# EAGLE board ebox (EAGLE 6.3), part 1 of 2
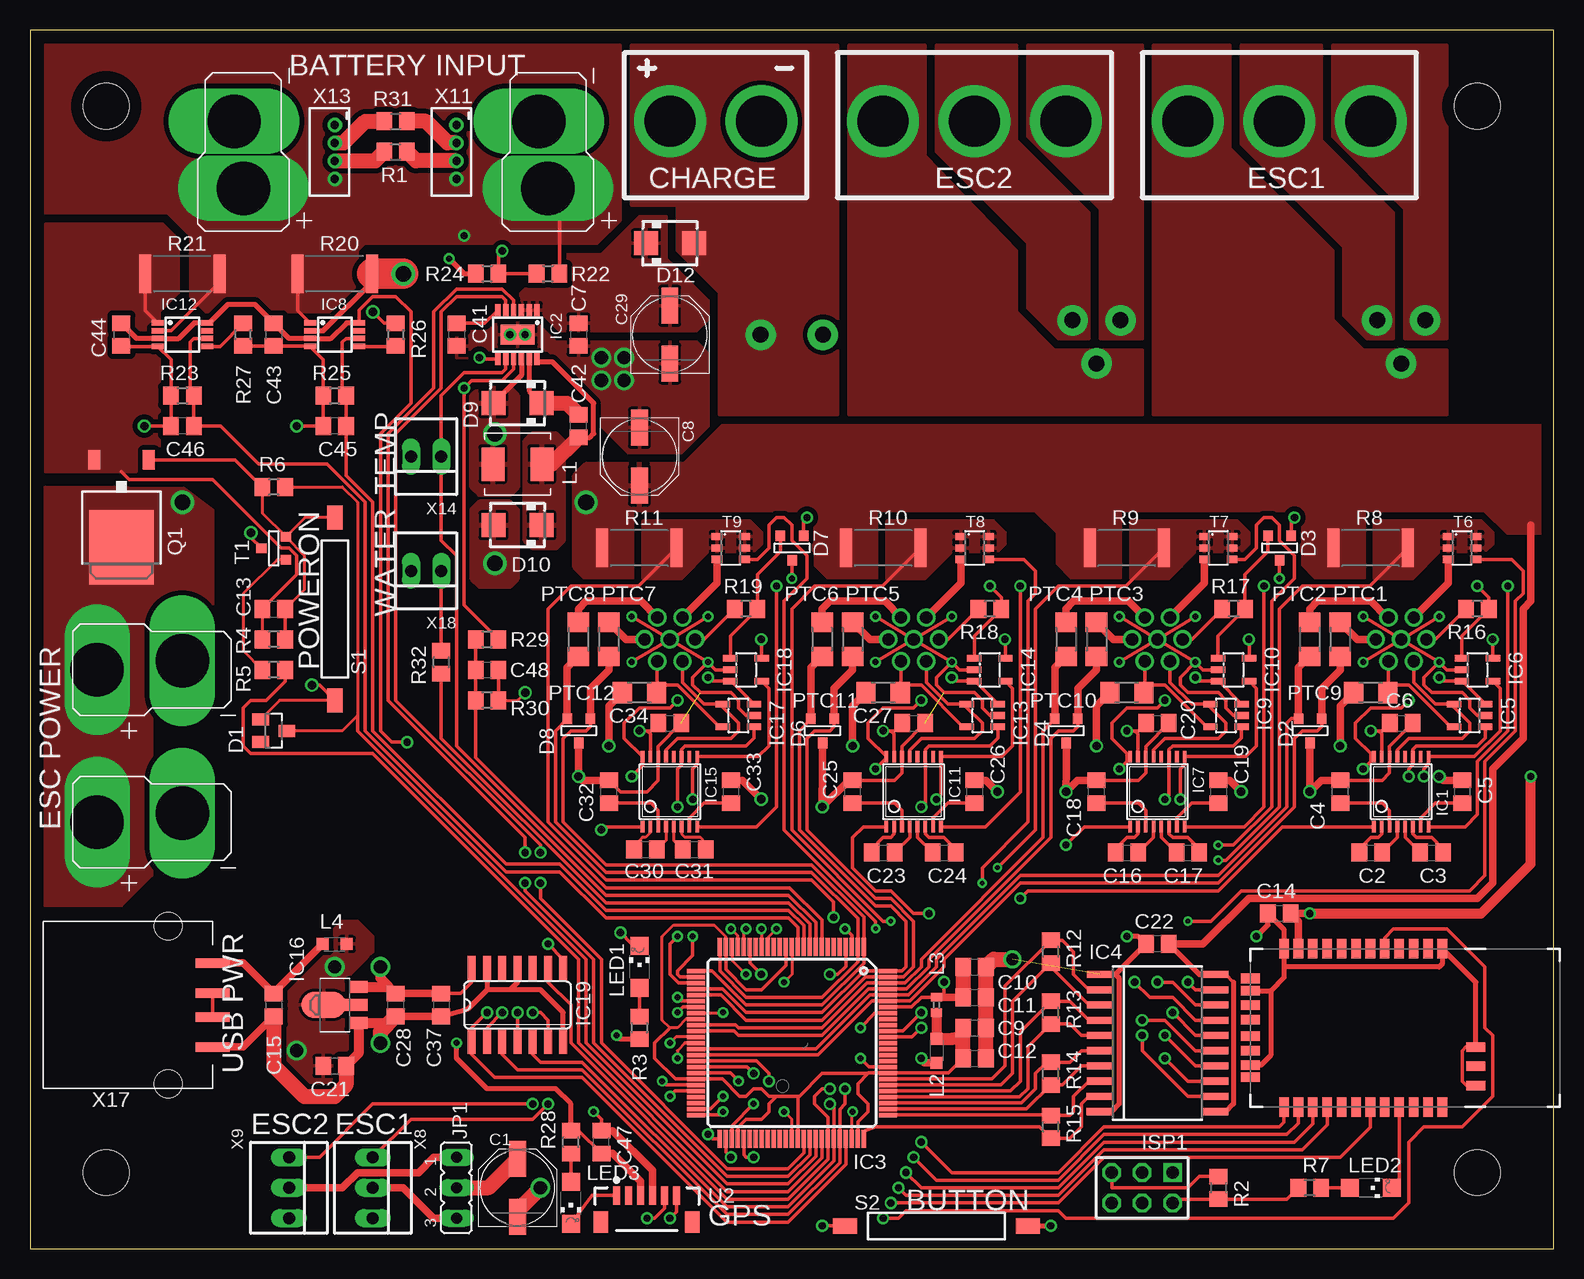
[diagram p0: board, top side]
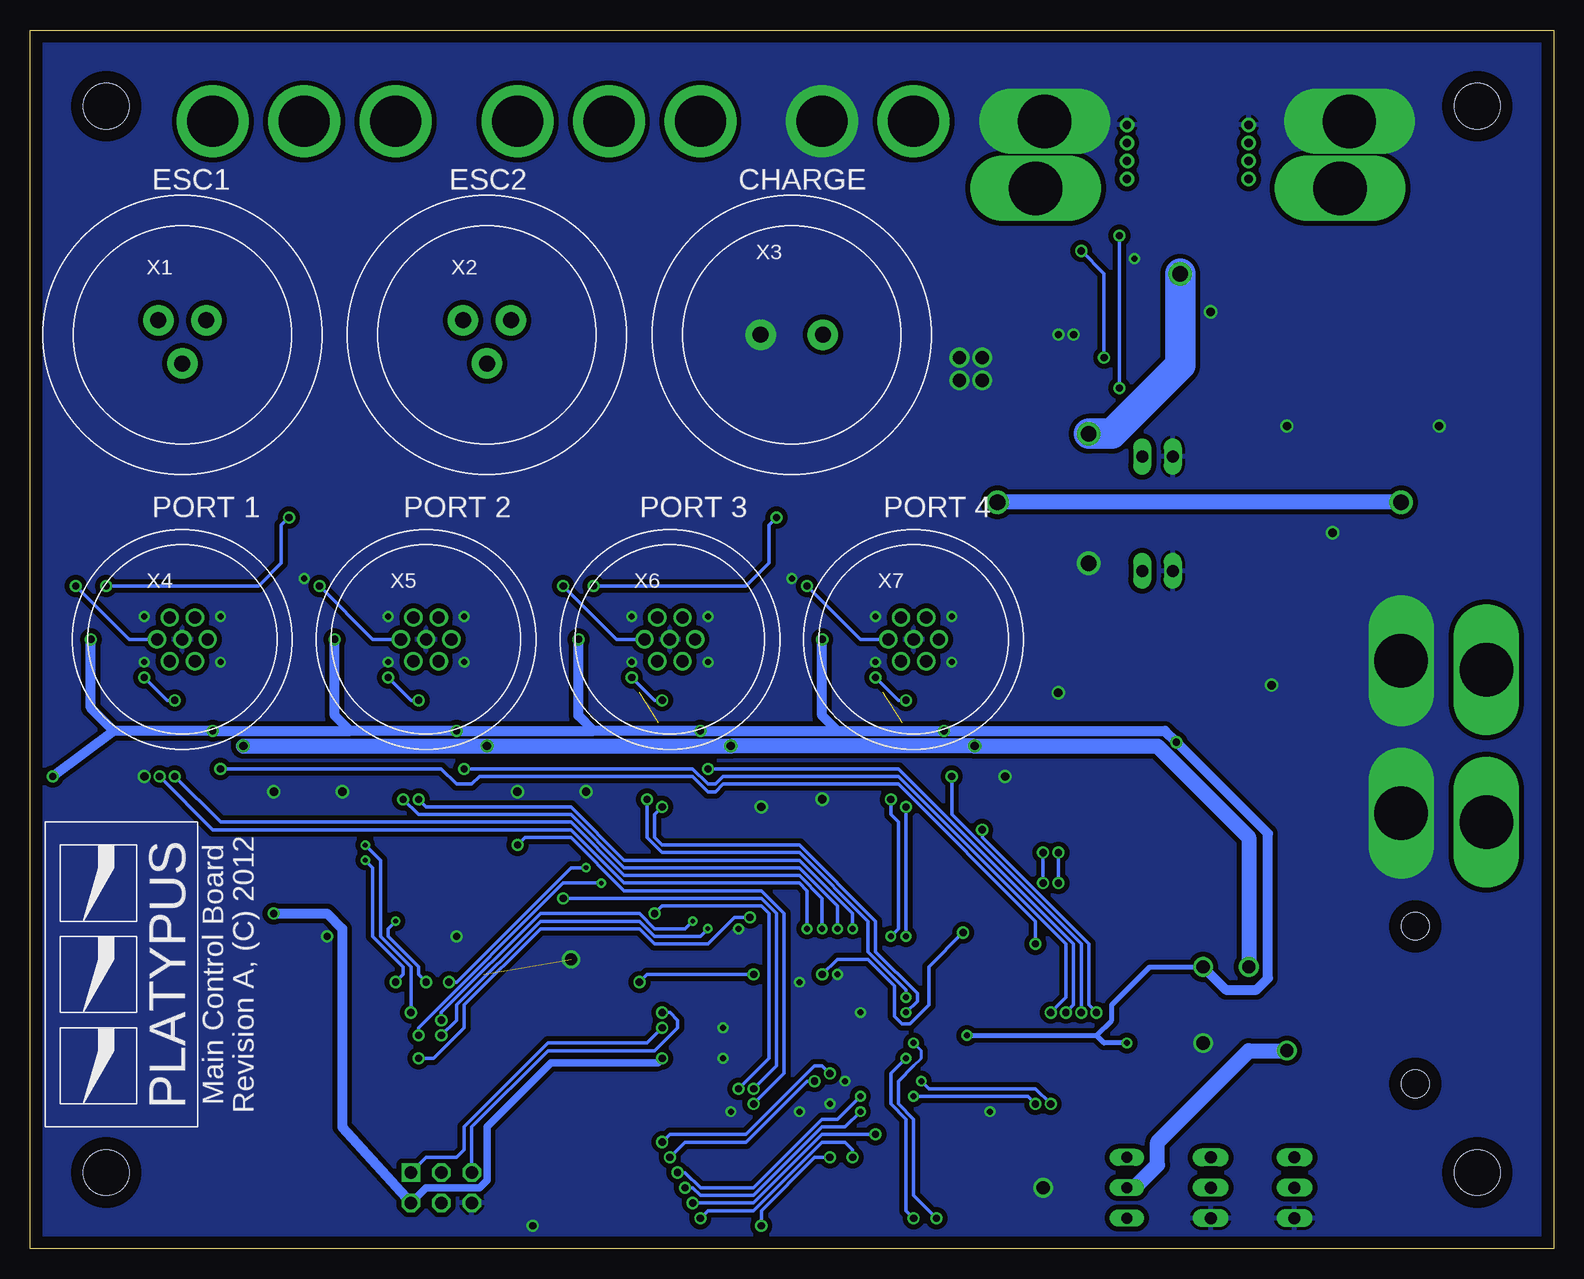
[diagram p1: board, bottom side, seen from below]

Size 127 x 101.6 mm. Coordinates in mm from the lower left corner, seen from the top.
Outline: 0,0 127,0 127,101.6 0,101.6 0,0
Copper layers (1*16): Top 0.035mm / dielectric 1.5mm / Bottom 0.035mm
Design rules "default *": minimum track width 10mil, minimum drill 15mil, track to track 5mil, track to pad 5mil, pad to pad 5mil, via to via 5mil, smd to smd 5mil, copper to edge 40mil, drill to drill 8mil, minimum pad ring 10mil, minimum via ring 8mil, stop-mask expansion 4mil, vias tented up to drill 0mil, thermal gap 10mil
Holes 3.81 mm at 120.65,95.25 120.65,6.35 6.35,6.35 6.35,95.25

## Footprints (pad centres in the part's own frame; a part is rotated, then mirrored left to right if it is on the bottom)
BULLET = drill 4.25 pad 6: P$1 0,0
PANASONIC_D = smd 3 x 1.4: + 2.4,0; - -2.4,0
C0805 = smd 1.3 x 1.5: 1 -0.95,0; 2 0.95,0
SOT23 = smd 1 x 1.4: 1 -0.95,-1.1; 2 0.95,-1.1; 3 0,1.1
SOT-23 = smd 0.787 x 0.889: 1 0.025,-1.016; 2 -0.94,1.016; 3 0.991,1.016
SMA = smd 2 x 2: A 2,0; C -2,0
TSSOP16 = smd 0.305 x 0.991: 1 -2.275,-2.918; 2 -1.625,-2.918; 3 -0.975,-2.918; 4 -0.325,-2.918; 5 0.325,-2.918; 6 0.975,-2.918; 7 1.625,-2.918; 8 2.275,-2.918; 9 2.275,2.918; 10 1.625,2.918; 11 0.975,2.918; 12 0.325,2.918; 13 -0.325,2.918; 14 -0.975,2.918; 15 -1.625,2.918; 16 -2.275,2.918
MSOP12-MSE = smd 0.45 x 1: 1 -1.625,-2.05; 2 -0.975,-2.05; 3 -0.325,-2.05; 4 0.325,-2.05; 5 0.975,-2.05; 6 1.625,-2.05; 7 1.625,2.05; 8 0.975,2.05; 9 0.325,2.05; 10 -0.325,2.05; 11 -0.975,2.05; 12 -1.625,2.05 | smd 2.845 x 1.651: 13 0,0
TQFP100 = smd 1.5 x 0.35: 1 -8,6; 2 -8,5.5; 3 -8,5; 4 -8,4.5; 5 -8,4; 6 -8,3.5; 7 -8,3; 8 -8,2.5; 9 -8,2; 10 -8,1.5; 11 -8,1; 12 -8,0.5; 13 -8,0; 14 -8,-0.5; 15 -8,-1; 16 -8,-1.5; 17 -8,-2; 18 -8,-2.5; 19 -8,-3; 20 -8,-3.5; 21 -8,-4; 22 -8,-4.5; 23 -8,-5; 24 -8,-5.5; 25 -8,-6; 51 8,-6; 52 8,-5.5; 53 8,-5; 54 8,-4.5; 55 8,-4; 56 8,-3.5; 57 8,-3; 58 8,-2.5; 59 8,-2; 60 8,-1.5; 61 8,-1; 62 8,-0.5; 63 8,0; 64 8,0.5; 65 8,1; 66 8,1.5; 67 8,2; 68 8,2.5; 69 8,3; 70 8,3.5; 71 8,4; 72 8,4.5; 73 8,5; 74 8,5.5; 75 8,6 | smd 0.35 x 1.5: 26 -6,-8; 27 -5.5,-8; 28 -5,-8; 29 -4.5,-8; 30 -4,-8; 31 -3.5,-8; 32 -3,-8; 33 -2.5,-8; 34 -2,-8; 35 -1.5,-8; 36 -1,-8; 37 -0.5,-8; 38 0,-8; 39 0.5,-8; 40 1,-8; 41 1.5,-8; 42 2,-8; 43 2.5,-8; 44 3,-8; 45 3.5,-8; 46 4,-8; 47 4.5,-8; 48 5,-8; 49 5.5,-8; 50 6,-8; 76 6,8; 77 5.5,8; 78 5,8; 79 4.5,8; 80 4,8; 81 3.5,8; 82 3,8; 83 2.5,8; 84 2,8; 85 1.5,8; 86 1,8; 87 0.5,8; 88 0,8; 89 -0.5,8; 90 -1,8; 91 -1.5,8; 92 -2,8; 93 -2.5,8; 94 -3,8; 95 -3.5,8; 96 -4,8; 97 -4.5,8; 98 -5,8; 99 -5.5,8; 100 -6,8
SOIC20R = smd 0.6 x 2.2: 1 -5.715,-4.775; 2 -4.445,-4.775; 3 -3.175,-4.775; 4 -1.905,-4.775; 5 -0.635,-4.775; 6 0.635,-4.775; 7 1.905,-4.775; 8 3.175,-4.775; 9 4.445,-4.8; 10 5.715,-4.8; 11 5.715,4.8; 12 4.445,4.8; 13 3.175,4.8; 14 1.905,4.8; 15 0.635,4.8; 16 -0.635,4.8; 17 -1.905,4.8; 18 -3.175,4.8; 19 -4.445,4.8; 20 -5.715,4.8
SOT23-DBV = smd 0.55 x 1.2: 1 -0.95,-1.3; 2 0,-1.3; 3 0.95,-1.3; 4 0.95,1.3; 5 -0.95,1.3
MSOP8 = smd 0.45 x 1: 1 -0.975,-2.05; 2 -0.325,-2.05; 3 0.325,-2.05; 4 0.975,-2.05; 5 0.975,2.05; 6 0.325,2.05; 7 -0.325,2.05; 8 -0.975,2.05
SOT89 = smd 1 x 1.5: 1 -1.499,-1.981; 3 1.499,-1.981 | smd 1 x 2: 2 0,-1.727 | smd 2.2 x 3.7: 2@1 0,0.94
SO14 = smd 0.66 x 2.032: 1 -3.81,-3.073; 2 -2.54,-3.073; 3 -1.27,-3.073; 4 0,-3.073; 5 1.27,-3.073; 6 2.54,-3.073; 7 3.81,-3.073; 8 3.81,3.073; 9 2.54,3.073; 10 1.27,3.073; 11 0,3.073; 12 -1.27,3.073; 13 -2.54,3.073; 14 -3.81,3.073
AVR-ISP-6 = drill 1.016 square: 1 -2.54,-1.27 | drill 1.016 octagon: 2 -2.54,1.27; 3 0,-1.27; 4 0,1.27; 5 2.54,-1.27; 6 2.54,1.27
JP2 = drill 0.914 long: 1 -2.54,0; 2 0,0; 3 2.54,0
IHLP-2020CZ-11 = smd 1.918 x 2.794: 1 -2.038,0; 2 2.038,0
L2012C = smd 1 x 1: 1 -1,0; 2 1,0
0402 = smd 0.7 x 0.9: 1 -0.65,0; 2 0.65,0
CHIPLED_1206 = smd 1.5 x 1.5: A 0,-1.75; C 0,1.75
R1206 = smd 1.6 x 1.803: 1 -1.422,0; 2 1.422,0
TO252 = smd 1 x 1.6: 1 -2.28,-4.8; 2 2.28,-4.8 | smd 5.4 x 6.2: 3 0,2.5
R0805 = smd 1.3 x 1.5: 1 -0.95,0; 2 0.95,0
R6332 = smd 1 x 3.2: 1 -3.1,0; 2 3.1,0
CT10-G1 = smd 2 x 1.3: 1 -7.62,0; 2 7.62,0
SOT23-6 = smd 0.6 x 0.9: 1 -0.95,-1.15; 2 0,-1.15; 3 0.95,-1.15; 4 0.95,1.15; 5 0,1.15; 6 -0.95,1.15
RN41 = smd 0.8 x 1.6: 1 -6.6,-6.6; 2 -5.4,-6.6; 3 -4.2,-6.6; 4 -3,-6.6; 5 -1.8,-6.6; 6 -0.6,-6.6; 7 0.6,-6.6; 8 1.8,-6.6; 9 3,-6.6; 10 4.2,-6.6; 11 5.4,-6.6; 12 6.6,-6.6; 13 6.6,6.6; 14 5.4,6.6; 15 4.2,6.6; 16 3,6.6; 17 1.8,6.6; 18 0.6,6.6; 19 -0.6,6.6; 20 -1.8,6.6; 21 -3,6.6; 22 -4.2,6.6; 23 -5.4,6.6; 24 -6.6,6.6 | smd 1.6 x 0.8: 25 -9.4,4.8; 26 -9.4,3.2; 27 -9.4,1.6; 28 9.4,3.1; 29 9.4,-3.1; 30 9.4,-4.122; 31 9.4,-1.9; 32 9.4,-0.7; 33 9.4,0.7; 34 9.4,1.9; 35 9.4,4.122
EM406 = smd 0.6 x 1.55: 1 0,0; 2 1,0; 3 2,0; 4 3,0; 5 4,0; 6 5,0 | smd 1.2 x 1.8: P$1 -1.3,-2.225; P$2 6.3,-2.225
7381-3PG-300 = drill 1.321 pad 2.54: 1 2,1.2; 2 -2,1.2; 3 0,-2.4
7381-2PG-300 = drill 1.321 pad 2.54: 1 2.6,0; 2 -2.6,0
17984-7PG-300 = drill 1.016: 1 -1.054,1.826; 2 -2.108,0; 3 -1.054,-1.826; 4 1.054,-1.826; 5 2.108,0; 6 1.054,1.826; 7 0,0
22-23-2031 = drill 1 long: 1 -2.54,0; 2 0,0; 3 2.54,0
DEANS_MALE = drill 4.445 pad 4.826 long: NEG -0.762,2.54; POS 0,-3.048
B4B-ZR = drill 0.7 pad 1.1: 1 -2.25,0; 2 -0.75,0; 3 0.75,0; 4 2.25,0
22-23-2021 = drill 1 long: 1 -1.27,0; 2 1.27,0
DEANS_FEMALE = drill 4.445 pad 4.826 long: NEG -0.762,2.54; POS 0,-4.572
1001-002-01100 = smd 0.8 x 2.82: 1 -3.5,0; 2 -1,0; 3 1,0; 4 3.5,0 | hole 2.3: -6.57,-3.71; 6.57,-3.71

## Placement (x,y rotation side)
B1  BULLET  [BULLET]  104.14,93.98 0 top
B2  BULLET  [BULLET]  111.76,93.98 0 top
B3  BULLET  [BULLET]  96.52,93.98 0 top
B4  BULLET  [BULLET]  78.74,93.98 0 top
B5  BULLET  [BULLET]  86.36,93.98 0 top
B6  BULLET  [BULLET]  71.12,93.98 0 top
B7  BULLET  [BULLET]  53.34,93.98 0 top
B8  BULLET  [BULLET]  60.96,93.98 0 top
C1  68uF  [PANASONIC_D]  40.64,5.08 90 top
C2  0.1uF  [C0805]  111.76,33.02 0 top
C3  0.1uF  [C0805]  116.84,33.02 0 top
C4  0.1uF  [C0805]  109.22,38.1 90 top
C5  0.1uF  [C0805]  119.38,38.1 270 top
C6  0.1uF  [C0805]  114.3,43.81 0 top
C7  1uF  [C0805]  45.72,76.2 270 top
C8  68uF  [PANASONIC_D]  50.8,66.04 270 top
C9  10uF  [C0805]  78.74,18.41 0 top
C10  10uF  [C0805]  78.74,23.5 0 top
C11  0.1uF  [C0805]  78.74,20.95 0 top
C12  0.1uF  [C0805]  78.74,15.88 0 top
C13  0.1uF  [C0805]  20.32,53.34 0 top
C14  0.1uF  [C0805]  104.14,27.94 180 top
C15  10uF  [C0805]  20.32,20.32 270 top
C16  0.1uF  [C0805]  91.44,33.02 0 top
C17  0.1uF  [C0805]  96.52,33.02 0 top
C18  0.1uF  [C0805]  88.9,38.1 90 top
C19  0.1uF  [C0805]  99.06,38.1 270 top
C20  0.1uF  [C0805]  93.98,43.81 0 top
C21  1uF  [C0805]  25.4,15.24 0 top
C22  10uF  [C0805]  93.98,25.4 180 top
C23  0.1uF  [C0805]  71.12,33.02 0 top
C24  0.1uF  [C0805]  76.2,33.02 0 top
C25  0.1uF  [C0805]  68.58,38.1 90 top
C26  0.1uF  [C0805]  78.74,38.1 270 top
C27  0.1uF  [C0805]  73.66,43.81 0 top
C28  1uF  [C0805]  30.48,20.32 270 top
C29  68uF  [PANASONIC_D]  53.34,76.2 90 top
C30  0.1uF  [C0805]  51.31,33.27 0 top
C31  0.1uF  [C0805]  55.37,33.27 0 top
C32  0.1uF  [C0805]  48.26,38.1 90 top
C33  0.1uF  [C0805]  58.42,38.1 270 top
C34  0.1uF  [C0805]  53.34,43.81 0 top
C37  0.1uF  [C0805]  34.29,20.32 270 top
C41  10uF  [C0805]  35.56,76.2 270 top
C42  1uF  [C0805]  45.72,68.58 90 top
C43  0.1uF  [C0805]  20.32,76.2 270 top
C44  0.1uF  [C0805]  7.62,76.2 270 top
C45  10pF  [C0805]  25.4,68.58 180 top
C46  10pF  [C0805]  12.7,68.58 180 top
C47  10uF  [C0805]  47.62,8.89 90 top
C48  10pF  [C0805]  38.1,48.26 0 top
D1  [SOT23]  20.32,43.18 270 top
D2  GSOT05C  [SOT-23]  106.68,43.18 0 top
D3  [SOT-23]  104.14,58.42 0 top
D4  GSOT05C  [SOT-23]  86.36,43.18 0 top
D6  GSOT05C  [SOT-23]  66.04,43.18 0 top
D7  [SOT-23]  63.5,58.42 0 top
D8  GSOT05C  [SOT-23]  45.72,43.18 0 top
D9  MBRA340T3  [SMA]  40.64,70.48 180 top
D10  MBRA340T3  [SMA]  40.64,60.33 180 top
D12  MBRA340T3  [SMA]  53.34,83.82 0 top
IC1  MAX3221CUE  [TSSOP16]  114.3,38.1 0 top
IC2  LT3652  [MSOP12-MSE]  40.64,76.2 180 top
IC3  XMEGA128A1  [TQFP100]  63.5,17.14 270 top
IC4  LT1161  [SOIC20R]  93.98,17.14 270 top
IC5  SN74LVC1G125  [SOT23-DBV]  120.02,44.45 90 top
IC6  SN74LVC1G125  [SOT23-DBV]  120.65,48.26 270 top
IC7  MAX3221CUE  [TSSOP16]  93.98,38.1 0 top
IC8  INA170  [MSOP8]  25.4,76.2 270 top
IC9  SN74LVC1G125  [SOT23-DBV]  99.69,44.45 90 top
IC10  SN74LVC1G125  [SOT23-DBV]  100.33,48.26 270 top
IC11  MAX3221CUE  [TSSOP16]  73.66,38.1 0 top
IC12  INA170  [MSOP8]  12.7,76.2 270 top
IC13  SN74LVC1G125  [SOT23-DBV]  79.38,44.45 90 top
IC14  SN74LVC1G125  [SOT23-DBV]  80.01,48.26 270 top
IC15  MAX3221CUE  [TSSOP16]  53.34,38.1 0 top
IC16  MCP170333MB  [SOT89]  25.4,20.32 90 top
IC17  SN74LVC1G125  [SOT23-DBV]  59.05,44.45 90 top
IC18  SN74LVC1G125  [SOT23-DBV]  59.69,48.26 270 top
IC19  74ALS04D  [SO14]  40.64,20.32 0 top
ISP1  AVR-PDIVERT  [AVR-ISP-6]  92.71,5.08 180 top
JP1  [JP2]  35.56,5.08 270 top
L1  5.6uH  [IHLP-2020CZ-11]  40.64,65.41 180 top
L2  10uH  [L2012C]  75.56,16.51 270 top
L3  FERRITE  [0402]  75.56,20.32 270 top
L4  10uH  [L2012C]  25.4,25.4 0 top
LED1  YEL  [CHIPLED_1206]  50.8,23.5 0 top
LED2  RED  [CHIPLED_1206]  111.76,5.08 270 top
LED3  GRN  [CHIPLED_1206]  45.09,3.81 180 top
PTC1  50mA  [R1206]  109.22,50.8 90 top
PTC2  50mA  [R1206]  106.68,50.8 90 top
PTC3  50mA  [R1206]  88.9,50.8 90 top
PTC4  50mA  [R1206]  86.36,50.8 90 top
PTC5  50mA  [R1206]  68.58,50.8 90 top
PTC6  50mA  [R1206]  66.04,50.8 90 top
PTC7  50mA  [R1206]  48.26,50.8 90 top
PTC8  50mA  [R1206]  45.72,50.8 90 top
PTC9  1A  [R1206]  111.76,46.35 0 top
PTC10  1A  [R1206]  91.44,46.35 0 top
PTC11  1A  [R1206]  71.12,46.35 0 top
PTC12  1A  [R1206]  50.8,46.35 0 top
Q1  FDD4141TO252  [TO252]  7.62,60.96 180 top
R1  1k  [R0805]  30.48,91.44 0 top
R2  10k  [R0805]  99.06,5.08 270 top
R3  330  [R0805]  50.8,18.41 270 top
R4  1k  [R0805]  20.32,50.8 180 top
R5  10k  [R0805]  20.32,48.26 180 top
R6  100k  [R0805]  20.32,63.5 180 top
R7  330  [R0805]  106.68,5.08 180 top
R8  0.010  [R6332]  111.76,58.42 180 top
R9  0.010  [R6332]  91.44,58.42 180 top
R10  0.010  [R6332]  71.12,58.42 180 top
R11  0.010  [R6332]  50.8,58.42 180 top
R12  2K  [R0805]  85.09,24.77 90 top
R13  2K  [R0805]  85.09,19.68 90 top
R14  2K  [R0805]  85.09,14.61 90 top
R15  2K  [R0805]  85.09,10.16 90 top
R16  100k  [R0805]  120.65,53.34 180 top
R17  100k  [R0805]  100.33,53.34 180 top
R18  100k  [R0805]  80.01,53.34 180 top
R19  100k  [R0805]  59.69,53.34 180 top
R20  0.050  [R6332]  25.4,81.28 180 top
R21  0.010  [R6332]  12.7,81.28 180 top
R22  626k  [R0805]  43.18,81.28 0 top
R23  4.99k  [R0805]  12.7,71.12 0 top
R24  412k  [R0805]  38.1,81.28 0 top
R25  1k  [R0805]  25.4,71.12 0 top
R26  2k  [R0805]  30.48,76.2 270 top
R27  10k  [R0805]  17.78,76.2 90 top
R28  330  [R0805]  45.09,8.89 90 top
R29  10k  [R0805]  38.1,50.8 0 top
R30  2k  [R0805]  38.1,45.72 180 top
R31  1k  [R0805]  30.48,93.98 0 top
R32  1K  [R0805]  34.29,48.9 90 top
S1  REED-SWITCH-CT10-1530-G1  [CT10-G1]  25.4,53.34 270 top
S2  REED-SWITCH-CT10-1530-G1  [CT10-G1]  75.56,1.91 0 top
T1  [SOT-23]  20.32,58.42 270 top
T6  [SOT23-6]  119.38,58.42 270 top
T7  [SOT23-6]  99.06,58.42 270 top
T8  [SOT23-6]  78.74,58.42 270 top
T9  [SOT23-6]  58.42,58.42 270 top
U1  BLUETOOTH-RN42  [RN41]  111.12,18.41 180 top
U2  D2523T_  [EM406]  48.9,4.45 0 top
U$1  PLATYPUS_LOGO  [PLATYPUS_LOGO_SMALL]  119.38,22.86 90 bottom
X1  7381-3PG-300  [7381-3PG-300]  114.3,76.2 0 bottom
X2  7381-3PG-300  [7381-3PG-300]  88.9,76.2 0 bottom
X3  7381-2PG-300  [7381-2PG-300]  63.5,76.2 0 bottom
X4  17984-7PG-300  [17984-7PG-300]  114.3,50.8 0 bottom
X5  17984-7PG-300  [17984-7PG-300]  93.98,50.8 0 bottom
X6  17984-7PG-300  [17984-7PG-300]  73.66,50.8 0 bottom
X7  17984-7PG-300  [17984-7PG-300]  53.34,50.8 0 bottom
X8  22-23-2031  [22-23-2031]  28.57,5.08 270 top
X9  22-23-2031  [22-23-2031]  21.59,5.08 270 top
X10  DEANS-MALE  [DEANS_MALE]  43.18,91.44 0 top
X11  B4B-ZR  [B4B-ZR]  35.56,91.44 270 top
X12  DEANS-MALE  [DEANS_MALE]  17.78,91.44 0 top
X13  B4B-ZR  [B4B-ZR]  25.4,91.44 270 top
X14  22-23-2021  [22-23-2021]  33.02,66.04 180 top
X15  DEANS-FEMALE  [DEANS_FEMALE]  10.16,48.26 270 top
X16  DEANS-FEMALE  [DEANS_FEMALE]  10.16,35.56 270 top
X17  USB_A  [1001-002-01100]  15.24,20.32 270 top
X18  22-23-2021  [22-23-2021]  33.02,56.52 180 top

## Library data of the parts
B1-B8 IC4-IC6 IC8-IC10 IC12-IC14 IC17 IC18 L1 U$1 X1-X7 X10 X12 X15-X17 = crw
C1-C34 C37 C41-C48 L2 L4 PTC1-PTC12 R1-R32 = rcl
D1 D9 D10 D12 = diode
D2-D4 D6-D8 T6-T9 = zetex; OC_FARNELL: unknown; OC_NEWARK: unknown
IC1 IC7 IC11 IC15 = maxim; MF: MAXIM; MPN: MAX3221CUE+; OC_FARNELL: 1379915; OC_NEWARK: 68K4608
IC2 = crw; MPN: AD7992BRMZ-0; OC_FARNELL: 1078311; OC_NEWARK: 31M4422
IC3 = atmel; OC_FARNELL: unknown; OC_NEWARK: unknown
IC16 = linear
IC19 = 74xx-us
ISP1 = avr-7
JP1 = jumper
L3 = inductors
LED1-LED3 = led
Q1 = transistor-fet
S1 S2 = switch-reed; MF: COTO TECHNOLOGY; MPN: CT10-1530-G1; OC_FARNELL: 1081696
T1 = zetex; MPN: DSS20200L-7; OC_FARNELL: unknown; OC_NEWARK: 25R4554
U1 U2 = SparkFun-RF
X8 X9 = con-molex; MF: MOLEX; MPN: 22-23-2031; OC_FARNELL: 1462950; OC_NEWARK: 30C0862
X11 X13 = con-jst; MF: FARNELL; MPN: B4B-ZR(LF)(SN); OC_FARNELL: 1830916; OC_NEWARK: 37K9960
X14 X18 = con-molex; MF: MOLEX; MPN: 22-23-2021; OC_FARNELL: 1462926; OC_NEWARK: 25C3832

## Nets
3ROU: IC4.18 T6.4
!CHRG: IC2.4 IC3.66
!CHRG_FAULT: IC2.5 IC3.65
!EN232_1: IC1.1 IC3.69 IC19.9
!EN232_2: IC3.70 IC7.1 IC19.5
!EN232_3: IC3.71 IC11.1 IC19.3
!EN232_4: IC3.72 IC15.1 IC19.1
+3V3: C6.1 C14.1 C20.1 C27.1 C28.1 C34.1 C37.1 C43.1 C44.1 C47.1 IC1.15 IC6.5 IC7.15 IC8.3 IC8.8 IC10.5 IC11.15 IC12.3 IC12.8 IC14.5 IC15.15 IC16.3 IC18.5 IC19.14 ISP1.2 L2.2 R2.2 R3.2 R7.2 R28.2 U1.11 U2.3
+5V: C1.+ C21.1 IC16.2 IC16.2@1 JP1.2 L4.2 PTC9.1 PTC10.1 PTC11.1 PTC12.1
+12V: C8.+ C22.1 IC4.11 IC4.20 Q1.3 R8.2 R9.2 R10.2 R11.2 X15.POS X16.POS
AVR_AVCC: C10.1 C11.1 IC3.4 IC3.94 L3.1
AVR_VCC: C9.1 C12.1 IC3.14 IC3.24 IC3.34 IC3.44 IC3.54 IC3.64 IC3.74 IC3.83 L2.1 L3.2
BATT1: R31.2 X11.2
BATT2: R1.2 X11.3
BATT+: IC2.9 IC8.1 IC12.2 R20.2 R21.1 R22.2 R29.2 X10.POS X11.4 X12.POS X13.4
BATT_CURR_IN: C45.1 IC3.11 IC8.6 R25.2
BATT_CURR_OUT: C46.1 IC3.12 IC12.6 R23.2
BATT_TEMP: IC2.8 IC3.9 X14.1
BATT_VSENSE: C48.1 IC3.8 R29.1 R30.2
BT_CTS: IC3.50 U1.16
BT_RESET: IC3.52 U1.5
BT_RTS: IC3.49 U1.15
BT_RXD: IC3.41 U1.14
BT_STATUS: IC3.51 U1.19
BT_TXD: IC3.42 U1.13
CHARGE: B7.P$1 D12.A X3.1
CHRG+: D9.A IC2.10 IC8.2 L1.2 R20.1
EN232_1: IC1.16 IC5.3 IC6.3 IC19.8
EN232_2: IC7.16 IC9.3 IC10.3 IC19.6
EN232_3: IC11.16 IC13.3 IC14.3 IC19.4
EN232_4: IC15.16 IC17.3 IC18.3 IC19.2
FAULT1: IC3.82 IC4.2 R12.2
FAULT2: IC3.80 IC4.4 R13.2
FAULT3: IC3.78 IC4.6 R14.2
FAULT4: IC3.76 IC4.8 R15.2
GND: B8.P$1 C1.- C4.2 C5.1 C6.2 C7.2 C8.- C9.2 C10.2 C11.2 C12.2 C14.2 C15.2 C18.2 C19.1 C20.2 C21.2 C22.2 C25.2 C26.1 C27.2 C28.2 C29.- C32.2 C33.1 C34.2 C37.2 C41.2 C43.2 C44.2 C45.2 C46.2 C47.2 C48.2 D1.1 D2.1 D3.1 D4.1 D6.1 D7.1 D8.1 D10.A IC1.14 IC2.13 IC3.3 IC3.13 IC3.23 IC3.33 IC3.43 IC3.53 IC3.63 IC3.73 IC3.84 IC3.93 IC4.1 IC4.10 IC5.2 IC6.2 IC7.14 IC8.4 IC9.2 IC10.2 IC11.14 IC12.4 IC13.2 IC14.2 IC15.14 IC16.1 IC17.2 IC18.2 IC19.7 IC19.11 IC19.13 ISP1.6 R23.1 R24.1 R25.1 R26.1 R27.1 R30.1 S1.2 S2.2 T1.1 U1.1 U1.12 U1.25 U1.27 U1.28 U1.29 U2.4 X3.2 X4.7 X5.7 X6.7 X7.7 X8.3 X9.3 X10.NEG X11.1 X12.NEG X13.1 X14.2 X15.NEG X16.NEG X17.4 X18.2
GPIO1A: D2.3 IC3.40 IC3.95 PTC1.1
GPIO1B: D2.2 IC3.39 IC3.96 PTC2.1
GPIO2A: D4.3 IC3.36 IC3.97 PTC3.1
GPIO2B: D4.2 IC3.35 IC3.98 PTC4.1
GPIO3A: D6.3 IC3.30 IC3.99 PTC5.1
GPIO3B: D6.2 IC3.29 IC3.100 PTC6.1
GPIO4A: D8.3 IC3.1 IC3.26 PTC7.1
GPIO4B: D8.2 IC3.2 IC3.25 PTC8.1
GPS_RXD: IC3.37 U2.5
GPS_TXD: IC3.38 U2.6
LED_STATUS: IC3.20 LED1.C
LED_STATUS1: LED2.C U1.21
MOT1_5V: JP1.3 X8.2
MOT1_A: B1.P$1 X1.1
MOT1_B: B2.P$1 X1.2
MOT1_C: B3.P$1 X1.3
MOT1_SIG: IC3.46 X8.1
MOT2_5V: JP1.1 X9.2
MOT2_A: B4.P$1 X2.1
MOT2_B: B5.P$1 X2.2
MOT2_C: B6.P$1 X2.3
MOT2_SIG: IC3.45 X9.1
N$1: C2.2 IC1.4
N$2: C2.1 IC1.2
N$3: C3.1 IC1.5
N$4: C3.2 IC1.6
N$5: IC3.90 ISP1.5 R2.1
N$6: LED1.A R3.1
N$7: IC3.89 ISP1.1
N$8: R5.2 T1.3
N$9: LED2.A R7.1
N$10: C4.1 IC1.3
N$11: C5.2 IC1.7
N$12: IC4.19 R8.1 T6.1 T6.2 T6.5 T6.6
N$13: C13.2 Q1.1 R4.1 R6.2 S1.1 T1.2
N$14: IC4.17 R9.1 T7.1 T7.2 T7.5 T7.6
N$15: IC4.15 R10.1 T8.1 T8.2 T8.5 T8.6
N$16: IC4.13 R11.1 T9.1 T9.2 T9.5 T9.6
N$17: IC3.10 R32.1
N$18: IC4.16 T7.4
N$19: IC4.14 T8.4
N$20: IC4.12 T9.4
N$21: C16.2 IC7.4
N$22: C16.1 IC7.2
N$23: C17.2 IC7.6
N$24: C17.1 IC7.5
N$25: C18.1 IC7.3
N$26: C19.2 IC7.7
N$27: C23.2 IC11.4
N$28: C23.1 IC11.2
N$29: C24.2 IC11.6
N$30: C24.1 IC11.5
N$31: C25.1 IC11.3
N$32: C26.2 IC11.7
N$33: C30.2 IC15.4
N$34: C30.1 IC15.2
N$35: C31.2 IC15.6
N$36: C31.1 IC15.5
N$37: C32.1 IC15.3
N$38: C33.2 IC15.7
N$39: C41.1 IC2.6
N$40: C15.1 L4.1 X17.1
N$41: C42.2 D9.C IC2.11
N$42: C42.1 D10.C IC2.12 L1.1
N$43: LED3.C U2.1
N$44: IC2.7 R22.1 R24.2
N$45: X17.2 X17.3
N$46: R1.1 X13.3
N$47: C7.1 C29.+ D12.C IC2.1 IC2.2 IC2.3
N$48: IC8.5 R26.2
N$49: IC12.5 R27.2
N$50: LED3.A R28.1
N$51: R31.1 X13.2
PWR_CTL: IC3.68 R5.1
PWR_CTL1: IC3.81 IC4.3 R12.1
PWR_CTL2: IC3.79 IC4.5 R13.1
PWR_CTL3: IC3.77 IC4.7 R14.1
PWR_CTL4: IC3.75 IC4.9 R15.1
PWR_SENSE: D1.3 IC3.67 R6.1
RX1_TTL: IC1.9 IC3.17 IC6.4
RX2_TTL: IC3.21 IC7.9 IC10.4
RX3_TTL: IC3.31 IC11.9 IC14.4
RX4_TTL: IC3.27 IC15.9 IC18.4
S1_5V: IC5.5 PTC9.2 X4.4
S1_12V: T6.3 X4.1
S1_GPIO_A: PTC1.2 X4.5
S1_GPIO_B: PTC2.2 X4.6
S1_RX: IC1.8 R16.2 X4.2
S1_RX_33V: D3.3 IC6.1 R16.1
S1_TX: IC1.13 IC5.4 X4.3
S2_5V: IC9.5 PTC10.2 X5.4
S2_12V: T7.3 X5.1
S2_GPIO_A: PTC3.2 X5.5
S2_GPIO_B: PTC4.2 X5.6
S2_RX: IC7.8 R17.2 X5.2
S2_RX_33V: D3.2 IC10.1 R17.1
S2_TX: IC7.13 IC9.4 X5.3
S3_5V: IC13.5 PTC11.2 X6.4
S3_12V: T8.3 X6.1
S3_GPIO_A: PTC5.2 X6.5
S3_GPIO_B: PTC6.2 X6.6
S3_RX: IC11.8 R18.2 X6.2
S3_RX_33V: D7.3 IC14.1 R18.1
S3_TX: IC11.13 IC13.4 X6.3
S4_5V: IC17.5 PTC12.2 X7.4
S4_12V: T9.3 X7.1
S4_GPIO_A: PTC7.2 X7.5
S4_GPIO_B: PTC8.2 X7.6
S4_RX: IC15.8 R19.2 X7.2
S4_RX_33V: D7.2 IC18.1 R19.1
S4_TX: IC15.13 IC17.4 X7.3
TX1_TTL: IC1.11 IC3.18 IC5.1
TX2_TTL: IC3.22 IC7.11 IC9.1
TX3_TTL: IC3.32 IC11.11 IC13.1
TX4_TTL: IC3.28 IC15.11 IC17.1
USER_BUTTON: IC3.55 S2.1
V+: C13.1 IC12.1 Q1.2 R4.2 R21.2
WATER_SENSE: R32.2 X18.1